# EAGLE board dpodweb (EAGLE 3.55)
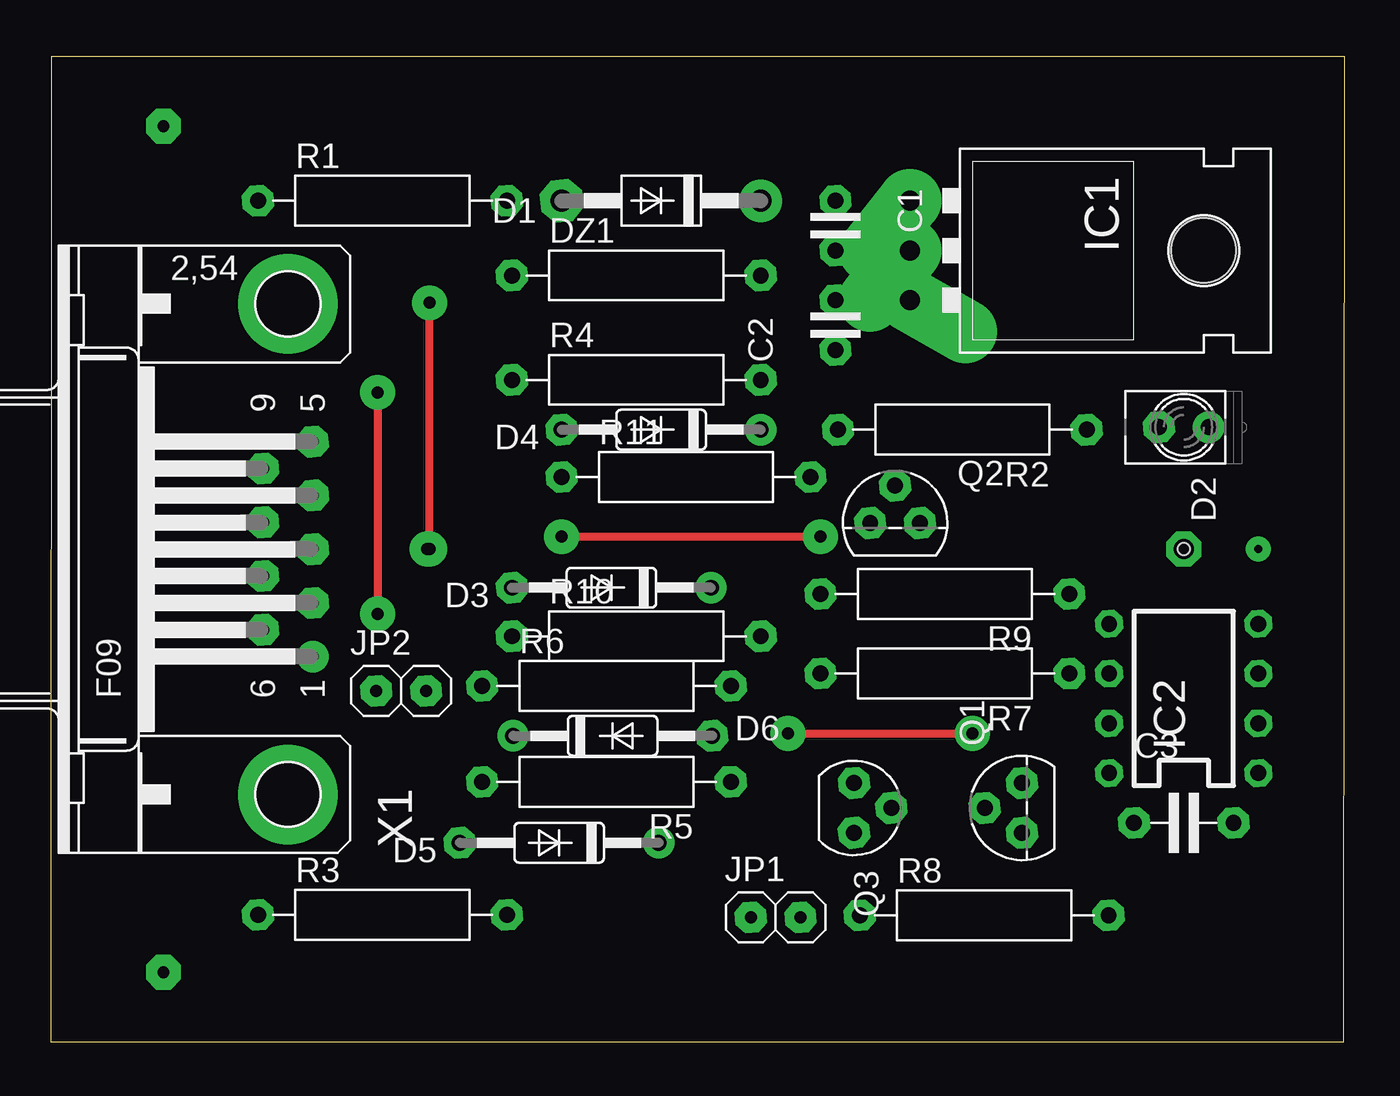
[diagram p0: board, top side]
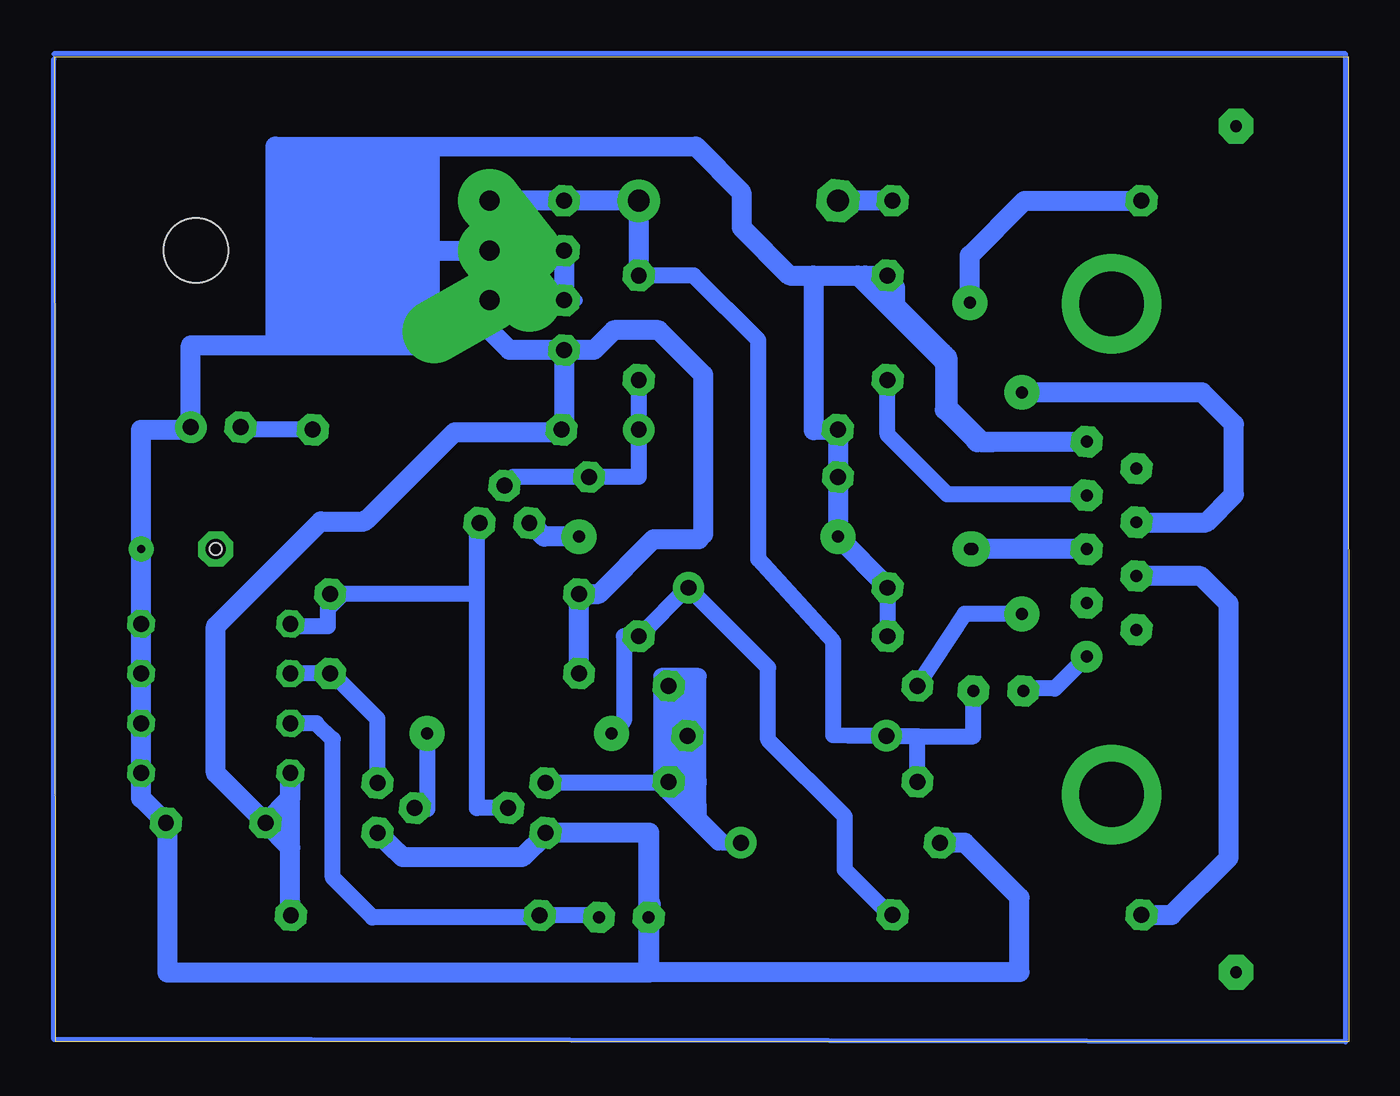
[diagram p1: board, bottom side, seen from below]

Size 66.04 x 50.28 mm. Coordinates in mm from the lower left corner, seen from the top.
Outline: 0,0 65.99,0 66.04,50.28 0.03,50.28 0,0
Copper layers used: Top, Bottom
Holes 0.61 mm at 57.82,25.14

## Footprints (pad centres in the part's own frame; a part is rotated, then mirrored left to right if it is on the bottom)
2,5 = drill 0.813 pad 1.6 octagon:  -1.27,0;  1.27,0
5 = drill 0.813 pad 1.6 octagon:  -2.54,0;  2.54,0
41-10 = drill 1.118 pad 2.159 octagon:  5.08,0 | drill 1.118 pad 2.159 round:  -5.08,0
52 = drill 0.813 pad 1.6 round:  -1.27,0 | drill 0.813 pad 1.6 octagon:  1.27,0
35-10 = drill 0.813 pad 1.6 round:  -5.08,0 | drill 0.813 pad 1.6 octagon:  5.08,0
12,5 = drill 0.813 pad 1.6 octagon:  -6.35,0;  6.35,0
XXL = drill 1.016 pad 3.251 offset:  -2.54,-3.81;  0,-3.81;  2.54,-3.81 | hole 3.302: 0,11.176
L8 = drill 0.813 pad 1.397 octagon:  -3.81,-3.81;  -1.27,-3.81;  1.27,-3.81;  3.81,-3.81;  3.81,3.81;  1.27,3.81;  -1.27,3.81;  -3.81,3.81
02 = drill 0.61 pad 1.6 octagon:  -1.27,0;  1.27,0
92D = drill 0.813 pad 1.6 octagon:  -1.27,0;  0,1.905;  1.27,0
T54E = drill 0.813 pad 1.6 octagon:  -1.27,0;  0,1.905;  1.27,0
9HP = drill 0.61 pad 1.6 round:  -5.486,-1.27 | drill 0.61 pad 1.6 octagon:  -2.743,-1.27;  0,-1.27;  2.743,-1.27;  5.486,-1.27;  -4.115,1.27;  -1.372,1.27;  1.372,1.27;  4.115,1.27 | drill 3.302 pad 5.08 round:  -12.522,0;  12.522,0

## Placement (x,y rotation side)
C1  22æF/63V  [2,5]  40.04,41.65 270 top
C2  4.7æF/35V  [2,5]  40.04,36.57 90 top
C3  100nF  [5]  57.82,11.17 0 top
D1  1N4007  [41-10]  31.15,42.92 180 top
D2  red high eff  [52]  57.82,31.36 180 top
D3  1N4148  [35-10]  28.61,23.17 180 top
D4  1N4148  [35-10]  31.15,31.24 180 top
D5  1N5819  [35-10]  25.95,10.16 180 top
D6  1N5819  [35-10]  28.68,15.62 0 top
DZ1  24V,1W  [12,5]  29.88,39.11 0 top
IC1  LP2954AIT  [XXL]  47.66,40.38 270 top
IC2  EEPROM  [L8]  57.82,17.52 90 top
JP1  WP  [02]  37,6.35 0 top
JP2  WP  [02]  17.88,17.9 0 top
Q1  2N3904  [92D]  49.57,11.93 90 top
Q2  2N3904  [92D]  43.09,26.47 0 top
Q3  BS170  [T54E]  41,11.93 270 top
R1  100 E 1Watt  [12,5]  16.93,42.92 0 top
R2  22K  [12,5]  46.52,31.24 180 top
R3  6.8K  [12,5]  16.93,6.47 0 top
R4  6.8K  [12,5]  29.88,33.78 0 top
R5  6.8K  [12,5]  28.36,13.27 180 top
R6  100 E  [12,5]  28.36,18.16 0 top
R7  10K  [12,5]  45.63,18.79 180 top
R8  22K  [12,5]  47.64,6.45 0 top
R9  10K  [12,5]  45.63,22.86 180 top
R10  10K  [12,5]  29.88,20.7 0 top
R11  10K  [12,5]  32.42,28.82 0 top
X1  RS 232  [9HP]  12.1,25.14 90 top

## Library data of the parts
C1-C3 DZ1 R1-R11 = DISCRETE
D1 D3-D6 = DIODE
D2 = LED
IC1 = V-REG
IC2 = DEMO
JP1 JP2 = PINHEAD
Q1-Q3 = TRANS-SM
X1 = SUBD-A

## Nets
DZ1: JP2. X1.
DZ2: C1. C2. C3. D2. D3. D4. D5. DZ1. IC1. IC2. JP1. Q1. Q2. Q3. R10. R11. X1.
IC1: C2. IC1. R2. R7. R9.
N$3: R6. X1.
N$4: IC2. JP1. R8.
N$5: IC2. Q1. R7.
N$6: D1. R1.
N$7: D5. Q3. R5. R6.
N$8: R1. X1.
N$9: C3. IC2. R8.
N$10: D4. Q2. R4. R11.
N$12: R3. X1.
N$13: IC2. Q2. Q3. R9.
N$18: D2. R2.
N$25: R4. X1.
R10: D3. Q1. R3. R10.
R11: C1. D1. D6. DZ1. IC1. JP2. R5.

## Tracks (layer width: path | path; a pad name or v marks a point on that pad's centre or on a via)
DZ1
  Bottom 0.813: 16.61,17.9 16.93,18.09 16.93,18.03 15,18.03 13.37,19.66
DZ2  (via drill 0.41 pad 1.27, 0.61 pad 1.78)
  Top 0.406: v26.07,25.78 v39.28,25.78
  Bottom 0.61: C2. 39.41,37.84
  Bottom 0.813: 41.82,26.54 41.82,26.47 | 35.73,6.35 35.73,6.85 | 23.53,23.24 D3. 23.53,20.7 | 27.34,39.11 27.32,39.09 | 23.61,39.11 24.92,39.07 | 23.61,39.11 23.79,39.11 23.79,39.1 23.8,39.09 23.8,39.11 23.83,39.09 | 23.53,39.1 23.52,39.09 | 23.53,39.1 23.53,39.11 | 23.61,39.11 23.55,39.11 23.53,39.1
  Bottom 1.016: C2. C1. 43.85,40.38 54.78,40.38 | 25.06,39.11 27.34,39.11 28.54,39.11 30.99,41.56 31,43.35 33.33,45.7 54.78,45.69 54.78,40.38 | 25.06,39.11 23.8,39.11 23.79,39.11 23.15,38.48 23.15,37.33 | 54.78,40.38 54.78,35.55 59.09,35.55 59.09,31.36 59.09,31.24 61.63,31.24 v61.63,25.14 61.63,21.33 61.63,18.79 61.63,16.25 61.63,13.71 61.63,12.44 C3. 60.43,11.11 60.39,11.07 60.29,11.07 60.29,3.53 35.7,3.53 35.7,6.98 | 26.07,28.7 D4. 27.32,31.21 27.32,39.09 | v39.28,25.78 41.06,25.78 41.82,26.54 | 23.53,23.24 v26.07,25.78 26.07,28.7 | 49.57,10.66 48.27,9.42 42.2,9.42 40.98,10.59 41,10.6 Q3. 35.73,10.66 | 35.7,6.98 35.73,6.35 | 35.7,6.98 35.7,10.66 35.73,10.66 | 13.37,30.63 18.66,30.63 19.04,30.68 20.61,32.25 20.6,34.81 23.66,37.84 23.65,37.83 24.92,39.07 | D5. 19.6,10.16 16.8,7.36 16.8,3.55 35.73,3.55 35.73,10.66 | 26.07,28.7 26.07,28.82 | 20.61,34.79 20.74,34.79 25.06,39.11 | 25.06,39.11 24.68,39.11 20.74,35.17 | 20.74,35.17 20.61,35.05 | 20.74,35.17 20.49,34.92 20.49,32.38 18.71,30.6 18.2,30.6
IC1
  Bottom 0.813: 40.04,31.36 R2. | R9. 39.03,23.11
  Bottom 1.016: IC1. 43.85,36.32 42.84,35.3 40.3,35.3 | 40.3,35.3 40.04,35.3 40.04,31.36 | R7. R9. 38.27,22.86 35.47,25.65 33.19,25.65 32.93,25.9 32.93,34.03 35.22,36.32 37.5,36.32 38.52,35.3 40.3,35.3
N$1  (via drill 1.02 pad 1.78)
  other vias: 57.82,25.14
N$3  (via drill 0.61 pad 1.78)
  Top 0.406: 16.68,33.27 v16.68,33.14 v16.68,21.84
  Bottom 0.813: v16.68,21.84 19.6,21.84 22.01,18.16
  Bottom 1.016: v16.68,33.14 7.48,33.14 5.86,31.52 5.86,27.94 7.28,26.51 10.68,26.51 10.81,26.39 10.83,26.41 10.83,26.51
N$4
  Bottom 0.813: 54.01,16.25 52.69,16.25 51.85,15.44 51.85,8.38 49.82,6.35 41.31,6.35 41.31,6.47 41.29,6.45 38.24,6.45 38.14,6.35 JP1.
N$5
  Bottom 0.813: 54.01,18.79 51.98,18.79 51.93,18.84 49.57,16.48 Q1. 49.57,13.14
N$6
  Bottom 1.016: R1. 26.07,42.92
N$7
  Bottom 0.813: 34.71,13.27 34.71,16.51 | R6. 34.71,16.51 | 34.71,13.27 35.28,13.2 41,13.2 41.06,13.2 | 34.71,13.27 34.71,13.71 34.58,13.71 34.96,13.33 34.96,13.2 31.92,10.16 31.03,10.16 | 34.71,16.51 33.69,16.51
  Bottom 1.016: 33.82,16.76 33.82,18.54 R6. 34.71,13.71 33.82,14.6 | 33.82,14.6 33.82,16.63 | 33.82,14.6 33.82,12.44
N$8  (via drill 0.61 pad 1.78)
  Top 0.406: 19.34,25.01 v19.34,25.14 v19.34,37.71
  Bottom 1.016: 13.37,25.14 v19.22,25.14 v19.34,25.14 | 10.58,42.92 16.55,42.92 19.34,40.13 v19.34,37.71
N$9
  Bottom 1.016: 40.17,31.11 45.63,31.11 50.13,26.64 50.15,26.64 50.23,26.56 52.46,26.56 57.82,21.2 57.82,13.71 55.28,11.17 | 54.01,9.9 55.28,11.17 | 55.28,11.17 54.01,12.44 IC2. 54.01,9.9 | R8. 54.01,7.11 54.01,9.9
N$10
  Bottom 0.813: 36.23,28.82 36.23,31.24 | 36.23,28.82 R4. | 43.09,28.38 42.65,28.82 36.23,28.82 | 36.23,28.82 R11.
N$11
  Bottom 1.016: 35.7,6.96 35.62,7.03
N$12
  Bottom 1.016: 10.83,23.77 7.56,23.77 6.13,22.35 6.13,9.39 9.06,6.47 10.58,6.47
N$13
  Bottom 0.813: 51.98,22.86 51.47,22.73 52.11,22.09 52.11,21.2 54.01,21.2 54.01,21.33 | Q2. 44.49,26.47 44.49,22.86 | 51.98,22.86 52.11,22.86 | 44.49,22.86 51.98,22.86 | 42.9,11.93 44.49,11.93 44.49,22.86
N$15
  Bottom 0.254: 66.08,50.41 0.17,50.41 0.17,0.12
N$16
  Bottom 0.813: 35.09,18.66 33.69,18.66 | 35.09,18.66 35.09,13.2 33.19,13.2 33.19,13.33 | 33.19,13.33 33.19,18.66 35.09,18.66 | 33.19,13.33 33.19,12.06 33.19,11.55
N$17
  Bottom 0.813: 32.17,10.16 35.22,13.2
N$18
  Bottom 0.813: D2. 56.55,31.24 52.87,31.24
N$19
  Bottom 1.016: 13.37,30.6 18.96,30.6
N$25
  Bottom 0.813: 23.53,33.78 23.53,30.98 20.49,27.94 13.25,27.94 13.3,27.88 13.37,27.88
R10  (via drill 0.61 pad 1.78)
  Top 0.406: v37.63,15.74 v47.03,15.74
  Bottom 0.813: 47.66,11.93 47.66,11.87 47.03,11.87 v47.03,15.74 | 33.69,23.17 33.69,23.11 | 33.69,23.17 33.69,23.24 R10. 37,20.7 | 33.69,23.19 33.72,23.19 29.63,19.1 29.63,15.41 25.72,11.5 25.72,8.78 23.28,6.35 R3. | 33.69,23.19 33.69,23.17 | 33.69,23.19 33.67,23.21 | 37,20.7 36.11,20.7 | 37,20.7 37,16.38 v37.63,15.74
R11
  Bottom 0.813: DZ1. 33.44,39.11 30.14,35.81 30.14,24.63 26.3,20.42 26.3,15.64 25.51,15.62 23.6,15.62 23.6,15.59 22.01,15.59 | R5. 22.01,15.59 | JP2. 19.15,17.89 19.16,15.59 22.01,15.59
  Bottom 1.016: 43.85,42.92 40.04,42.92 D1. DZ1.
S$1
  Bottom 0.254: 0.17,0 66.08,0.12 66.08,50.16
S$2  (via drill 0.61 pad 1.78)
  other vias: 5.75,46.73
S$3  (via drill 0.61 pad 1.78)
  other vias: 5.75,3.55
(copper drawn outside any net)
  shapes: Bottom area x1